# Altium PCB PCB1.PcbDoc
Units mm, origin at the board's own origin, x right, y up, seen from the top; angles counter-clockwise.
Board outline 96 x 34.67 mm, 2 copper layers (Top Layer, Bottom Layer); 11 components, 10 nets, 87 pads, 14 vias.
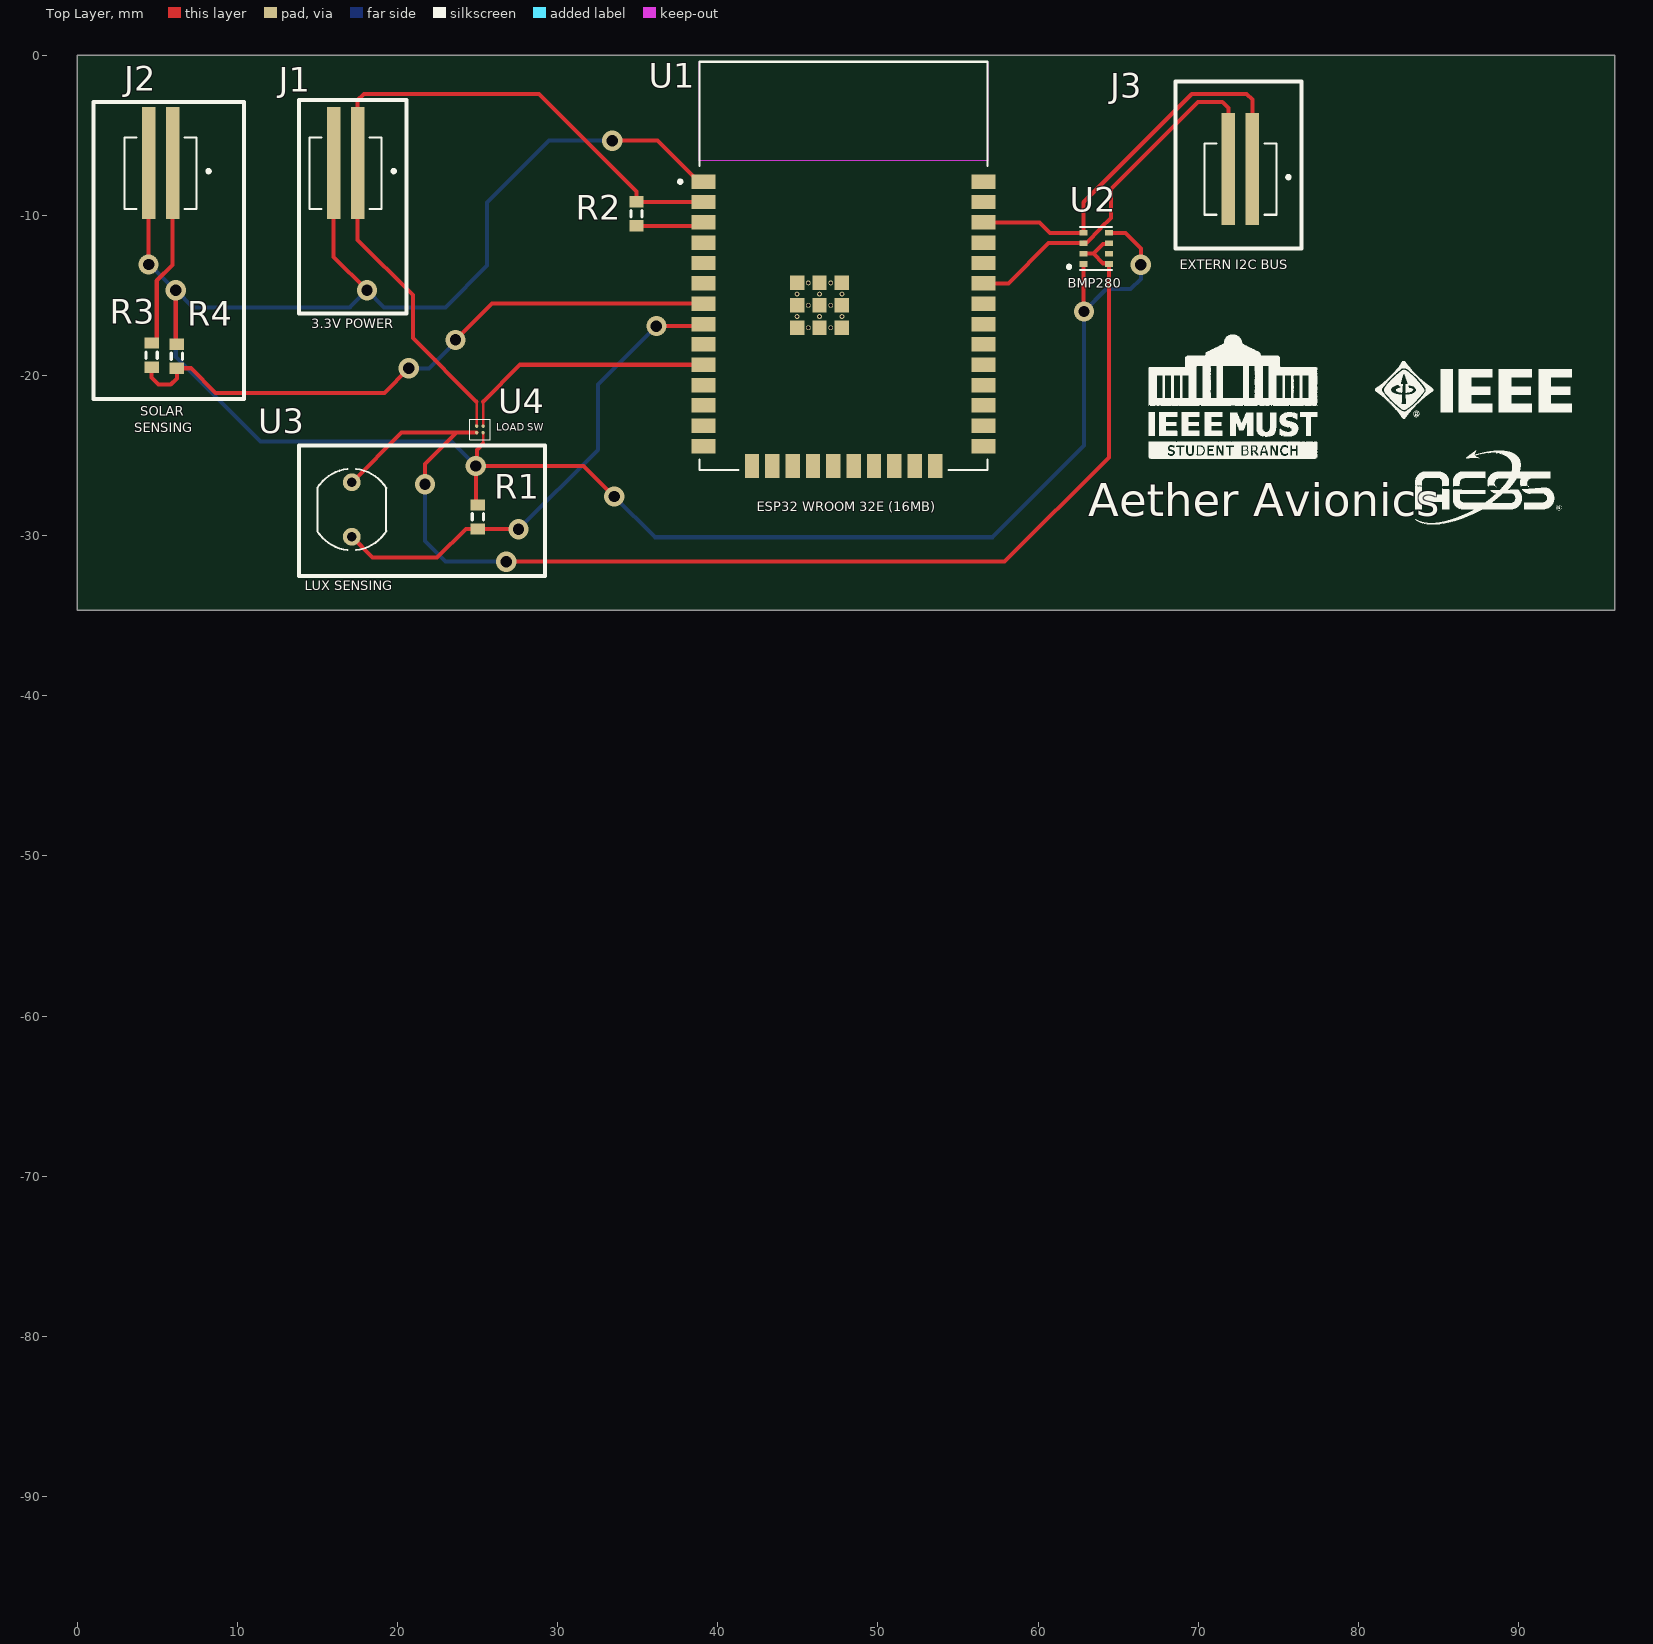
[diagram p0: Top Layer view]
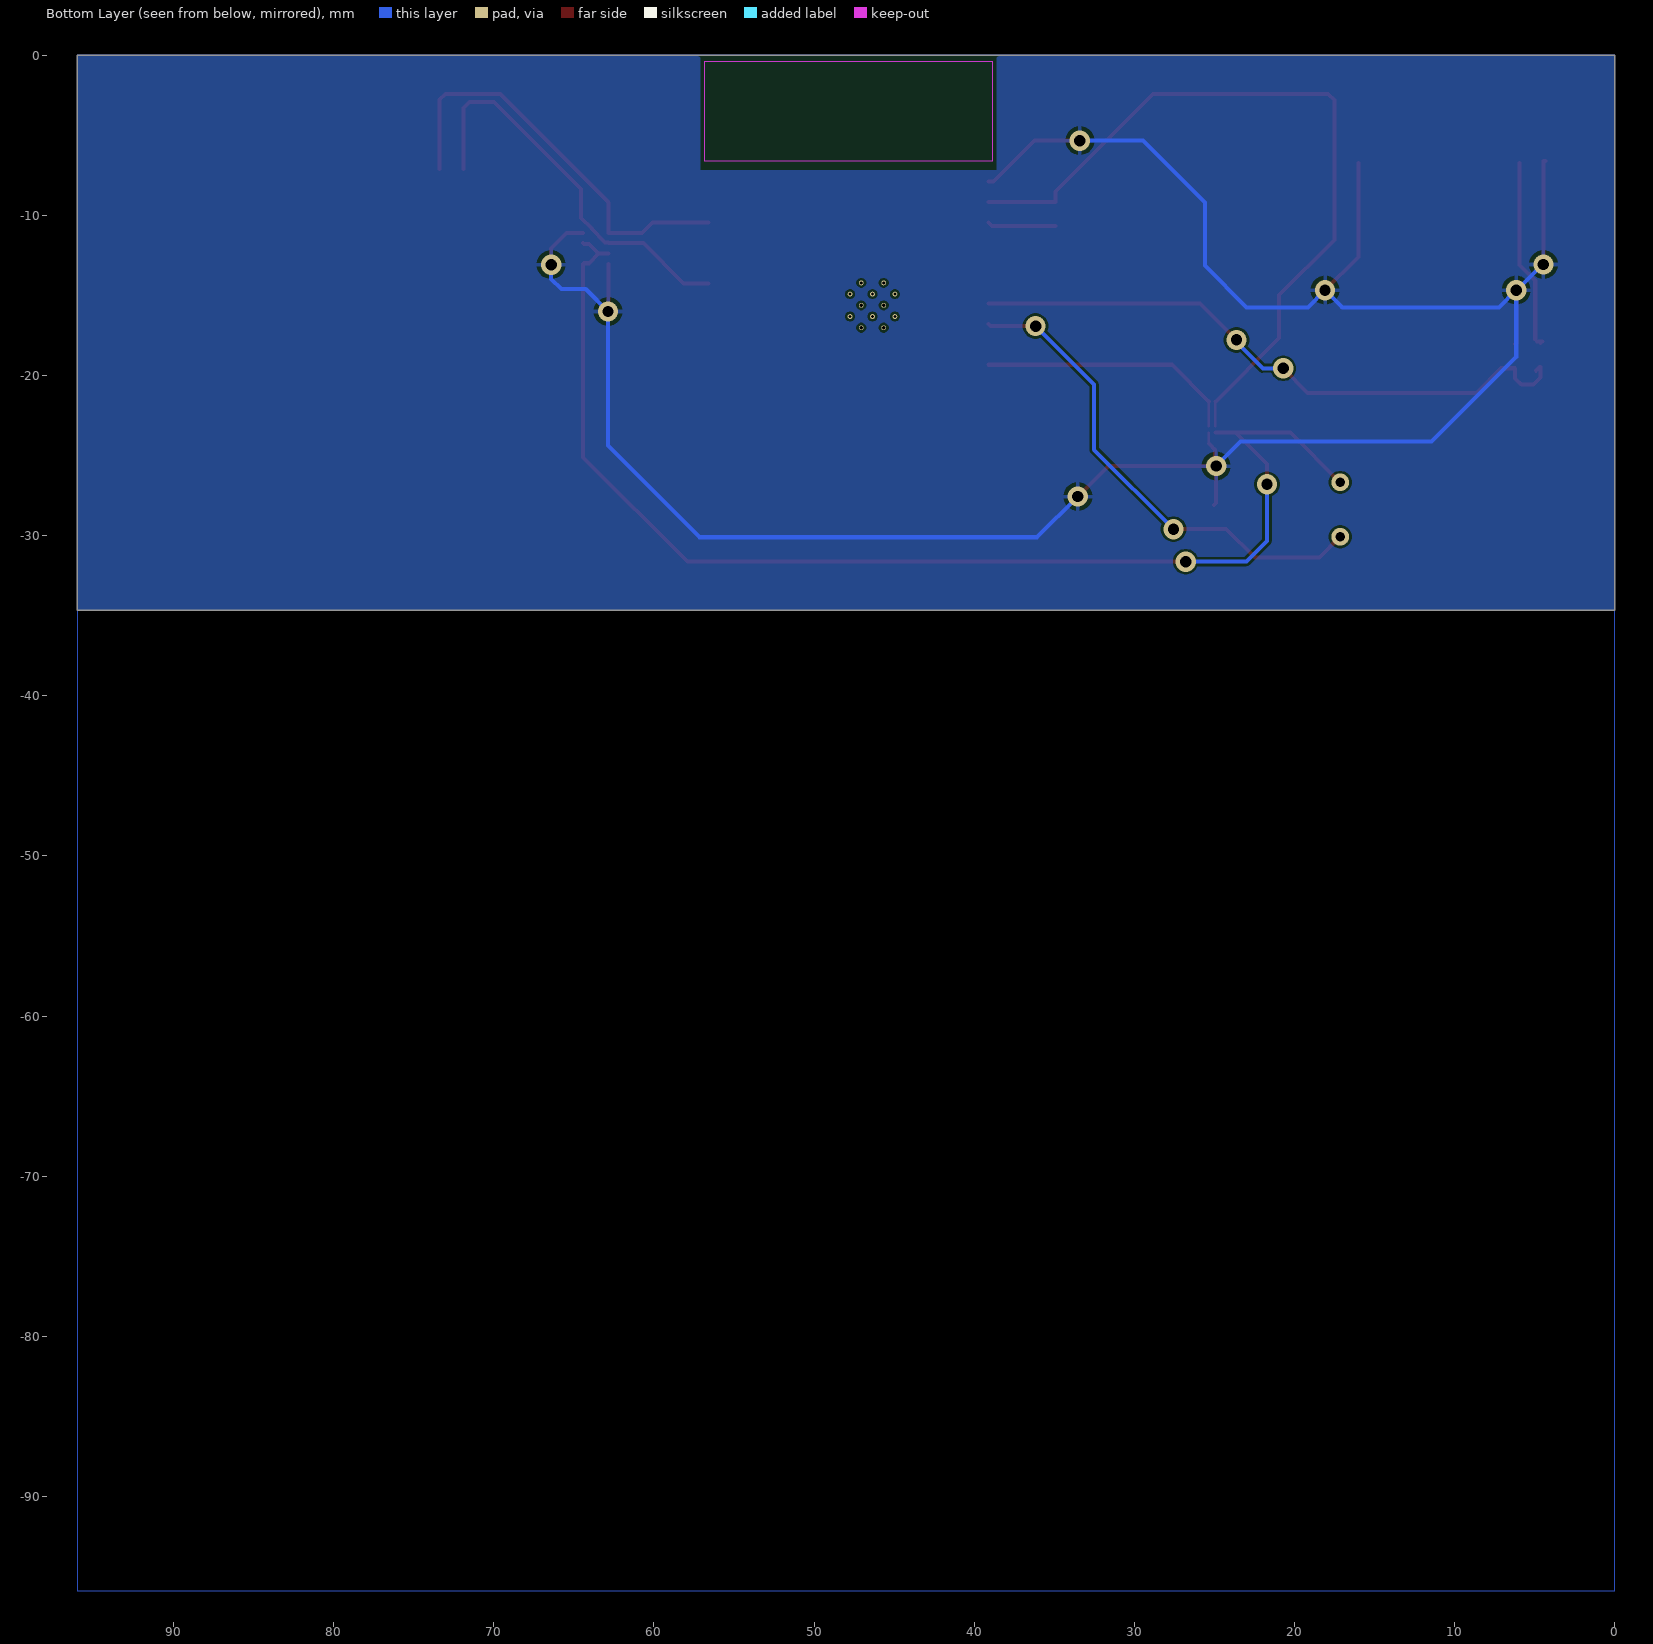
[diagram p1: Bottom Layer view, seen from below]
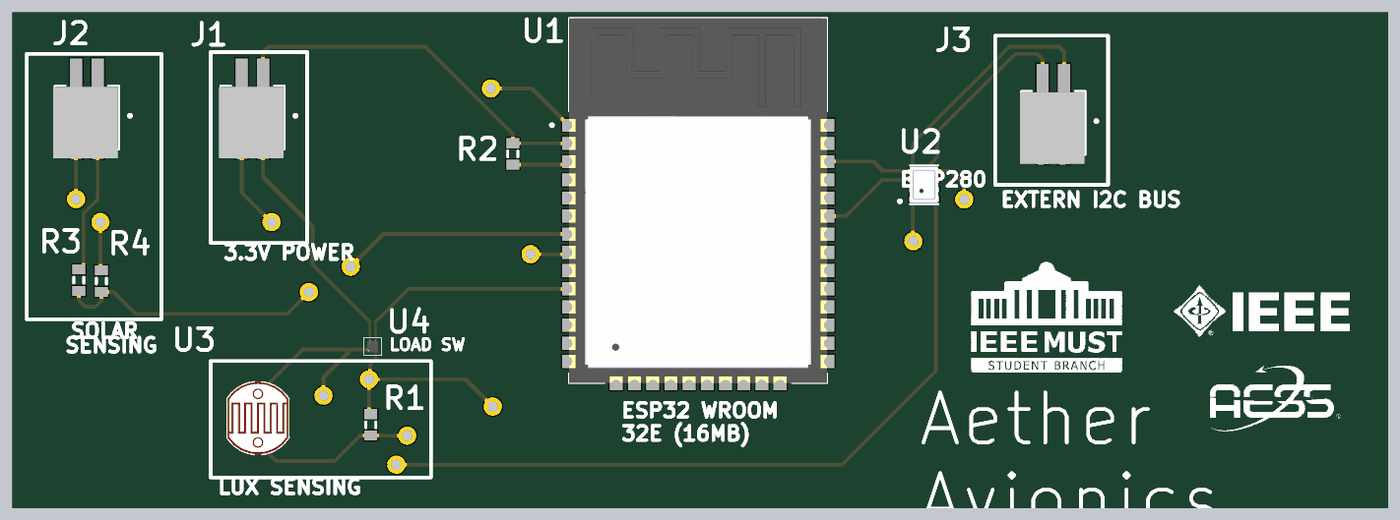
[diagram p2: 3D render of the assembled board from above, using the file's embedded part models]

## Layer stack, top to bottom
Top Solder: solder mask 0.0102, Solder Resist, Dk 3.5
Top Layer: signal copper 0.0356
Dielectric 1: dielectric 0.32, FR-4, Dk 4.8
Bottom Layer: signal copper 0.0356
Bottom Solder: solder mask 0.0102, Solder Resist, Dk 3.5

## Board outline
0,-34.671 0,0 96,0 96,-34.671
board region "Default Layer Stack Region": 0,-34.671 0,0 96,0 96,-34.671
board region "Default Layer Stack Region": 0,-34.671 0,0 96,0 96,-34.671
board region "Layer Stack Region 1": 0,-34.671 0,0 96,0 96,-34.671

## Design rules (kind name [scope] priority, off if disabled: settings)
Clearance [All] p1: gap=0.15 ignorepadtopadclearanceinfootprint=FALSE
PolygonConnect [All] p1: connectstyle=Relief reliefconductorwidth=0.254 reliefentries=4 polygonreliefangle="90 Angle" airgapwidth=0.254
RoutingVias [All] p1: holewidth=0.711 width=1.27 viastyle="Through Hole" minholewidth=0.711 minwidth=1.27 maxholewidth=0.711 maxwidth=1.27
SolderMaskExpansion [All] p1: expansion=0.102 istentingtop=FALSE
Width [All] p1: maxlimit=0.254 minlimit=0.254 preferedwidth=0.254
30 further rules are at their usual default settings.

## Components (designator, comment, footprint, x,y, rotation, side; value= is the part's Value field where it differs from the comment)
J1 "2 pin MOLEX (POWER)" TE_5-1775443-2 16.764,-7.366 r180 top
J2 "2 pin MOLEX (SOLAR SENSING)" TE_5-1775443-2 5.207,-7.366 r180 top
J3 "2 pin MOLEX I2C" TE_5-1775443-2 72.632,-7.737 r180 top
R1 "Res3" J1-0603 25.019,-28.829 r90 top value=10K
R2 "Res3" J1-0603 34.925,-9.906 r90 top value=10K
R3 "Res3" J1-0603 4.643,-18.729 r270 top value=33K
R4 "Res3" J1-0603 6.223,-18.796 r90 top value=10K
U1 "ESP32-WROOM-32E_(16MB)" XCVR_ESP32-WROOM-32E_(16MB) 47.852,-13.158 r0 top
U2 "BMP280" XDCR_BMP280 63.627,-12.065 r180 top
U3 "PDV-P8003" XDCR_PDV-P8003 17.145,-28.37 r270 top
U4 "TPS22916BYFPT" BGA4C40P2X2_77X77X50 25.146,-23.368 r90 top

## Footprints (in the part's own frame and the unit in brackets; to place one, negate y for a bottom-side part, rotate by r counter-clockwise, add the part's x,y. Pads: shape width x height; smd on the part's side, far side on the other; paste and mask are expansions set on the pad)
BGA4C40P2X2_77X77X50 [mil]
  round 8 smd: A1(-8,8) A2(8,8) B1(-8,-8) B2(8,-8)
  body extent -15,-15 15,15, height 20
J1-0603 [mm] "Chip Resistor, Body 1.6x0.8mm, IPC High Density"
  rect 0.7x0.9 smd: 1(-0.75,0) 2(0.75,0)
  silkscreen extent -0.2,-0.35 0.2,0.35, body extent -0.85,-0.48 0.85,0.48, height 0.9
TE_5-1775443-2 [mm]
  rect 0.85x7 smd paste-5 mask+0: 1(-0.75,-0.625) 2(0.75,-0.625)
  silkscreen extent -3.1,-2.22 2.25,2.22, body extent -2.16,-2.14 2.34,2.91, height 4.41
XCVR_ESP32-WROOM-32E_(16MB) [mm]
  rect 1.5x0.9 smd: 1(-8.75,5.26) 2(-8.75,3.99) 3(-8.75,2.72) 4(-8.75,1.45) 5(-8.75,0.18) 6(-8.75,-1.09) 7(-8.75,-2.36) 8(-8.75,-3.63) 9(-8.75,-4.9) 10(-8.75,-6.17) 11(-8.75,-7.44) 12(-8.75,-8.71) 13(-8.75,-9.98) 14(-8.75,-11.25) 25(8.75,-11.25) 26(8.75,-9.98) 27(8.75,-8.71) 28(8.75,-7.44) 29(8.75,-6.17) 30(8.75,-4.9) 31(8.75,-3.63) 32(8.75,-2.36) 33(8.75,-1.09) 34(8.75,0.18) 35(8.75,1.45) 36(8.75,2.72) 37(8.75,3.99) 38(8.75,5.26)
  rect 0.9x1.5 smd: 15(-5.715,-12.5) 16(-4.445,-12.5) 17(-3.175,-12.5) 18(-1.905,-12.5) 19(-0.635,-12.5) 20(0.635,-12.5) 21(1.905,-12.5) 22(3.175,-12.5) 23(4.445,-12.5) 24(5.715,-12.5)
  rect 0.9x0.9 smd: 39_1(-2.9,-1.06) 39_2(-1.5,-1.06) 39_3(-0.1,-1.06) 39_4(-2.9,-2.46) 39_5(-1.5,-2.46) 39_6(-0.1,-2.46) 39_7(-2.9,-3.86) 39_8(-1.5,-3.86) 39_9(-0.1,-3.86)
  round 0.3 hole 0.2 mask+0: 39_10(-2.2,-1.06) 39_11(-0.8,-1.06) 39_12(-2.9,-1.76) 39_13(-1.5,-1.76) 39_14(-0.1,-1.76) 39_15(-2.2,-2.46) 39_16(-0.8,-2.46) 39_17(-2.9,-3.16) 39_18(-1.5,-3.16) 39_19(-0.1,-3.16) 39_20(-2.2,-3.86) 39_21(-0.8,-3.86)
  Keep-Out Layer region: 9,6.56 -9,6.56 -9,12.75 9,12.75
  silkscreen extent -10.3,-12.75 9,12.75, body extent -9,-12.75 9,12.75, height 3.25
XDCR_BMP280 [mm]
  rect 0.5x0.35 smd: 1(0.8,0.975) 2(0.8,0.325) 3(0.8,-0.325) 4(0.8,-0.975) 5(-0.8,-0.975) 6(-0.8,-0.325) 7(-0.8,0.325) 8(-0.8,0.975)
  silkscreen extent -1,-1.35 1.79,1.35, body extent -0.98,-1.25 1.02,1.25, height 1
XDCR_PDV-P8003 [mm]
  round 1.108 hole 0.6: 1(-1.7,0) 2(1.7,0)
  silkscreen extent -2.53,-2.15 2.53,2.15, body extent -2.54,-2.14 2.54,2.14, height 2.38

## Part data
J1 J2 J3: library part 5-1775443-2, "Conn High Performance Interconnect HDR 2 POS 1.5mm Solder ST SMD T/R", Package=None, Check_prices=https://www.snapeda.com/parts/5-1775443-2/TE+Connectivity+AMP+Connectors/view-part/?ref=eda, EU_RoHS_Compliance=Compliant, MF="TE Connectivity", MP=5-1775443-2, SnapEDA_Link=https://www.snapeda.com/parts/5-1775443-2/TE+Connectivity+AMP+Connectors/view-part/?ref=snap
R1 R2 R3 R4: "Resistor", LatestRevisionDate=29-May-2009, LatestRevisionNote="IPC-7351 Footprint Added.", PackageDescription="Chip Resistor", PackageReference=J1-0603, Published=8-Jun-2000, Publisher="Altium Limited"
U1: "Bluetooth, WiFi 802.11b/g/n, Bluetooth v4.2 +EDR, Class 1, 2 and 3 Transceiver Module 2.4GHz ~ 2.5GHz Integrated, Trace Surface Mount", Package=None, Availability="Not in stock", Check_prices=https://www.snapeda.com/parts/ESP32-WROOM-32E%20(16MB)/Espressif+Systems/view-part/?ref=eda, MF="Espressif Systems", MP="ESP32-WROOM-32E (16MB)", Price=None, SnapEDA_Link=https://www.snapeda.com/parts/ESP32-WROOM-32E%20(16MB)/Espressif+Systems/view-part/?ref=snap
U2: "BMP280 Absolute Barometric Pressure Sensor for Battery Powered Devices 2 x 2.5mm", Package=None, Availability=Unavailable, MP=BMP280, Price=None
U3: "CdS Cells 520nm 16 ~ 33kOhms @ 10 lux", Package="Radial Advanced Photonix", Check_prices=https://www.snapeda.com/parts/PDV-P8003/Advanced+Photonix/view-part/?ref=eda, MF="Advanced Photonix", MP=PDV-P8003, SnapEDA_Link=https://www.snapeda.com/parts/PDV-P8003/Advanced+Photonix/view-part/?ref=snap
U4: "5.5-V, 2-A, 60-mÎ©, 10-nA leakage load switch with output discharge", Package="DSBGA-4 Texas Instruments", Check_prices=https://www.snapeda.com/parts/TPS22916BYFPT/Texas+Instruments/view-part/?ref=eda, MF="Texas Instruments", MP=TPS22916BYFPT, SnapEDA_Link=https://www.snapeda.com/parts/TPS22916BYFPT/Texas+Instruments/view-part/?ref=snap

## Via types
v1: diameter 1.27, hole 0.711, Top Layer to Bottom Layer, 14 vias

## Nets (pads, with @x,y where several pads share a name; then routed paths per layer and width w, separated by ;. In a path a pad name is that pad's centre, name@x,y a point inside that pad or via, vN(x,y) a via of type N, cw(c..) or ccw(c..) an arc to the next point about the centre after c; other vN are vias at no path point)
3.3V: J1.1 R2.2 U1.2 U4.A2 | length 48.4
  Top Layer w0.15: U4.A2 24.943,-21.641
  Top Layer w0.254: 24.943,-21.641 20.955,-17.653 20.955,-14.986 17.514,-11.545 J1.1 17.514,-2.806 17.907,-2.413 28.829,-2.413 34.925,-8.509 R2.2 39.09,-9.156 U1.2
3.3V_SW: U2.2 U2.6 U2.8 U3.1 U4.A1 | length 77.8
  Top Layer w0.254: U3.1 20.244,-23.571 23.673,-23.571 ; v1(21.717,-26.797) 21.717,-25.527 23.673,-23.571 ; U4.A1 23.673,-23.571 ; v1(26.797,-31.623) 57.912,-31.623 64.427,-25.108 U2.8 64.379,-12.992 64.06,-12.992 63.458,-12.39 ; U2.2 63.458,-12.39 ; U2.6 64.379,-11.788 64.06,-11.788 63.458,-12.39
  Bottom Layer w0.254: v1(21.717,-26.797) 21.717,-30.331 23.009,-31.623 v1(26.797,-31.623)
GND: J1.2 J2.2 R1.2 R4.2 U1.1 U2.1 U2.5 U4.B1 | length 155.9
  Top Layer w0.15: 25.349,-24.247 U4.B1
  Top Layer w0.254: J2.2@4.33,-6.614 J2.2 ; v1(4.457,-13.069) J2.2 ; J2.2@4.457,-6.614 J2.2 ; v1(6.155,-14.673) 6.155,-17.966 R4.2@6.223,-18.034 ; J1.2 16.014,-12.594 v1(18.093,-14.673) ; R1.2 24.892,-27.952 v1(24.892,-25.654) ; 25.349,-24.247 24.958,-24.638 24.958,-25.588 v1(24.892,-25.654) ; v1(33.401,-5.334) 36.238,-5.334 38.802,-7.898 U1.1 ; v1(33.528,-27.559) 31.623,-25.654 v1(24.892,-25.654) ; U2.1 62.846,-13.059 62.846,-15.983 v1(62.865,-16.002) ; U2.5 65.446,-11.09 66.418,-12.062 v1(66.418,-13.081)
  Bottom Layer w0.254: v1(4.457,-13.069) 4.504,-13.069 6.108,-14.673 v1(6.155,-14.673) ; v1(24.892,-25.654) 23.368,-24.13 11.434,-24.13 6.155,-18.851 v1(6.155,-14.673) ; v1(33.401,-5.334) 29.464,-5.334 25.59,-9.207 25.59,-13.144 22.987,-15.748 19.168,-15.748 v1(18.093,-14.673) 17.018,-15.748 7.23,-15.748 v1(6.155,-14.673) ; v1(33.528,-27.559) 36.068,-30.099 57.15,-30.099 62.865,-24.384 v1(62.865,-16.002) 64.257,-14.61 65.273,-14.61 65.781,-14.61 66.418,-13.973 v1(66.418,-13.081)
LOAD_SW_EN: U1.10 U4.B2 | length 16.2
  Top Layer w0.15: U4.B2 25.349,-21.641
  Top Layer w0.254: 25.349,-21.641 27.662,-19.328 U1.10
LUX: R1.1 U1.8 U3.2 | length 30.9
  Top Layer w0.254: U3.2 18.444,-31.369 22.479,-31.369 24.269,-29.579 25.769,-29.579 25.781,-29.591 v1@27.551,-29.591 ; v1(36.169,-16.914) 38.976,-16.914 U1.8
  Bottom Layer w0.254: v1(27.559,-29.591) 32.512,-24.638 32.512,-20.57 v1(36.169,-16.914)
NetJ2_1: J2.1 R3.1 | length 12.1
  Top Layer w0.254: R3.1 4.528,-17.864 4.858,-17.864 4.966,-17.756 4.966,-14.084 5.957,-13.093 J2.1
NetR2_1: R2.1 U1.3 | length 4.3
  Top Layer w0.254: R2.1 38.884,-10.656 U1.3
SCL: J3.1 U1.36 U2.4 | length 26.3
  Top Layer w0.254: U1.36 60.095,-10.438 60.747,-11.09 U2.4 62.827,-9.182 69.596,-2.413 73.025,-2.413 73.382,-2.77 J3.1
SDA: J3.2 U1.33 U2.3 | length 25
  Top Layer w0.254: U1.33 58.142,-14.248 60.65,-11.74 U2.3 62.875,-11.692 63.042,-11.692 63.9,-10.834 63.9,-10.8 64.54,-10.16 64.54,-8.358 69.977,-2.921 71.501,-2.921 71.882,-3.302 J3.2
SOLAR_SENSE: R3.2 R4.1 U1.7 | length 39.5
  Top Layer w0.254: R3.2@4.92,-19.702 4.697,-19.479 R3.2 4.643,-20.137 5.08,-20.574 5.842,-20.574 6.223,-20.193 R4.1 7.1,-19.546 8.636,-21.082 19.177,-21.082 v1(20.701,-19.558) ; v1(23.622,-17.78) 25.908,-15.494 39.078,-15.494 U1.7
  Bottom Layer w0.254: v1(20.701,-19.558) 21.971,-19.558 23.622,-17.907 v1(23.622,-17.78)
pads on no net: U1.4 U1.5 U1.6 U1.9 U1.11 U1.12 U1.13 U1.14 U1.15 U1.16 U1.17 U1.18 U1.19 U1.20 U1.21 U1.22 U1.23 U1.24 U1.25 U1.26 U1.27 U1.28 U1.29 U1.30 U1.31 U1.32 U1.34 U1.35 U1.37 U1.38 U1.39_1 U1.39_2 U1.39_3 U1.39_4 U1.39_5 U1.39_6 U1.39_7 U1.39_8 U1.39_9 U1.39_10 U1.39_11 U1.39_12 U1.39_13 U1.39_14 U1.39_15 U1.39_16 U1.39_17 U1.39_18 U1.39_19 U1.39_20 U1.39_21 U2.7

## Polygon pours and split planes (outlines as drawn)
GND on Bottom Layer "NONET_L-01_P-001" (solid, pour order 3): 0,0 0,-34.671 96,-34.671 96,0
GND on Bottom Layer "NONET_L02_P000" (solid, shelved, pour order 0): 0,0 96.012,0 96.012,-95.885 0,-95.885

## Other copper
Bottom Layer:
  pour cut-out: 38.602,-0.158 38.602,-7.198 57.102,-7.198 57.102,-0.158

## Silkscreen, mask and mechanical layers (free items; w line width, h text height)
Top Overlay:
  drawing of 75 lines, arcs and shapes, not listed
  text "EXTERN I2C BUS" at 68.834,-13.578 h1
  text "BMP280" at 61.849,-14.732 h1
  text "3.3V POWER" at 14.605,-17.261 h1
  text "SOLAR" at 3.937,-22.733 h1
  text "LOAD SW" at 26.162,-23.613 h0.8
  text "SENSING" at 3.556,-23.749 h1
  text "ESP32 WROOM 32E (16MB)" at 42.418,-28.702 h1
  text "Aether Avionics" at 63.119,-29.464 h3.5
  text "LUX SENSING" at 14.224,-33.644 h1
Mechanical 1:
  the board outline again, w0.254

## Text inside footprints (layer, text, board x,y; h text height)
U1: Mechanical 13 "ANTENNA" at 41.852,-4.158 h1.78
U4: Mechanical 13 "2" at 24.101,-22.527 h1.27 r90; Mechanical 13 "1" at 24.102,-22.935 h1.27 r90